# Altium PCB PCB1.PcbDoc
Units mm, origin at the board's own origin, x right, y up, seen from the top; angles counter-clockwise.
Board outline 50 x 50 mm, 2 copper layers (Top Layer, Bottom Layer); 11 components, 11 nets, 36 pads, 0 vias.
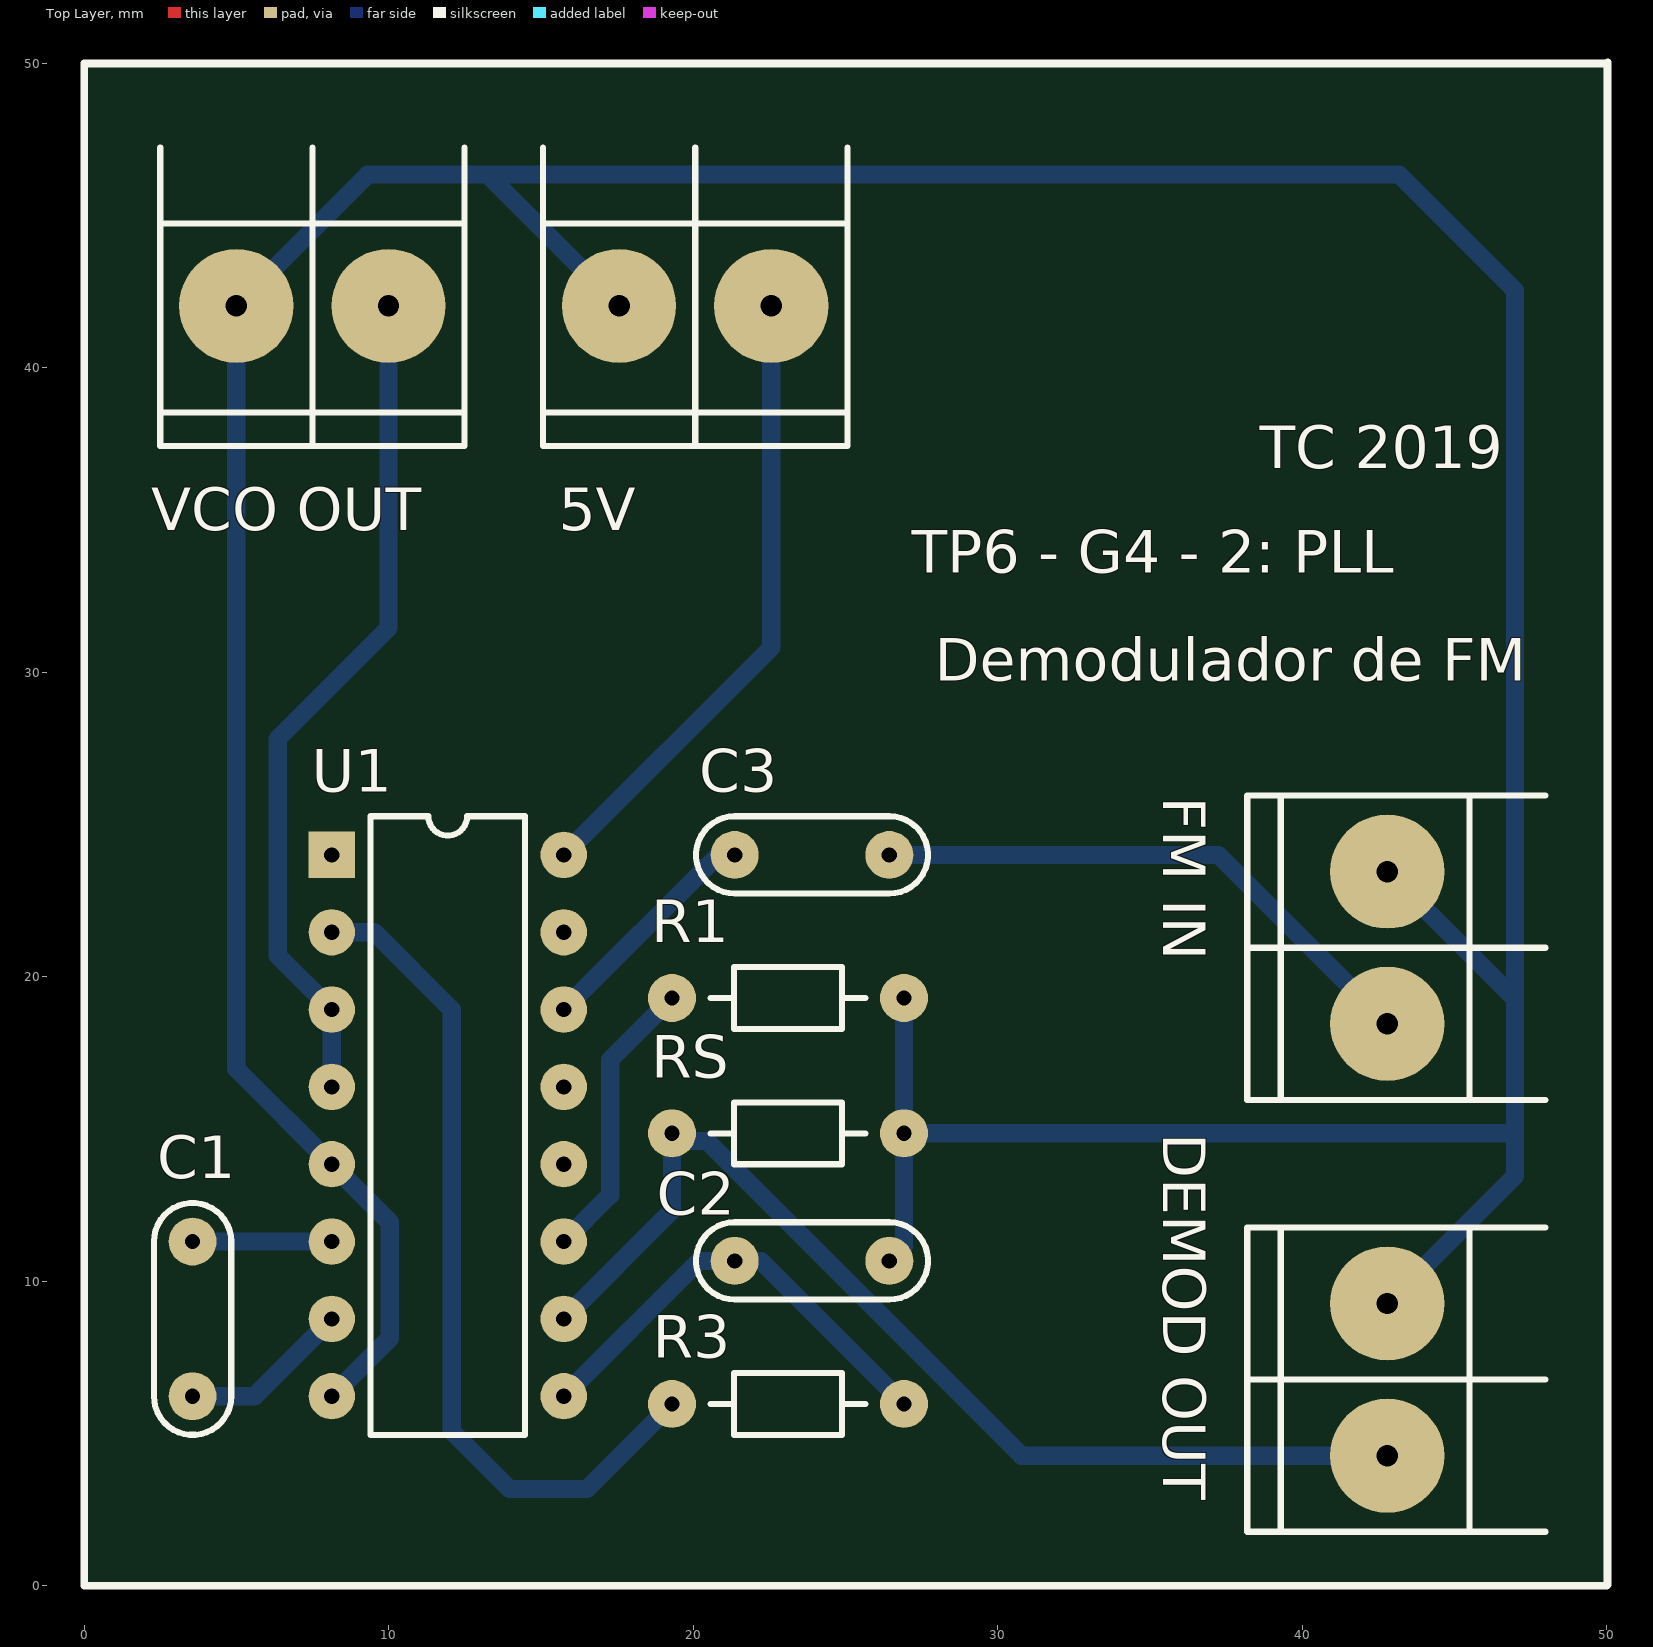
[diagram p0: Top Layer view]
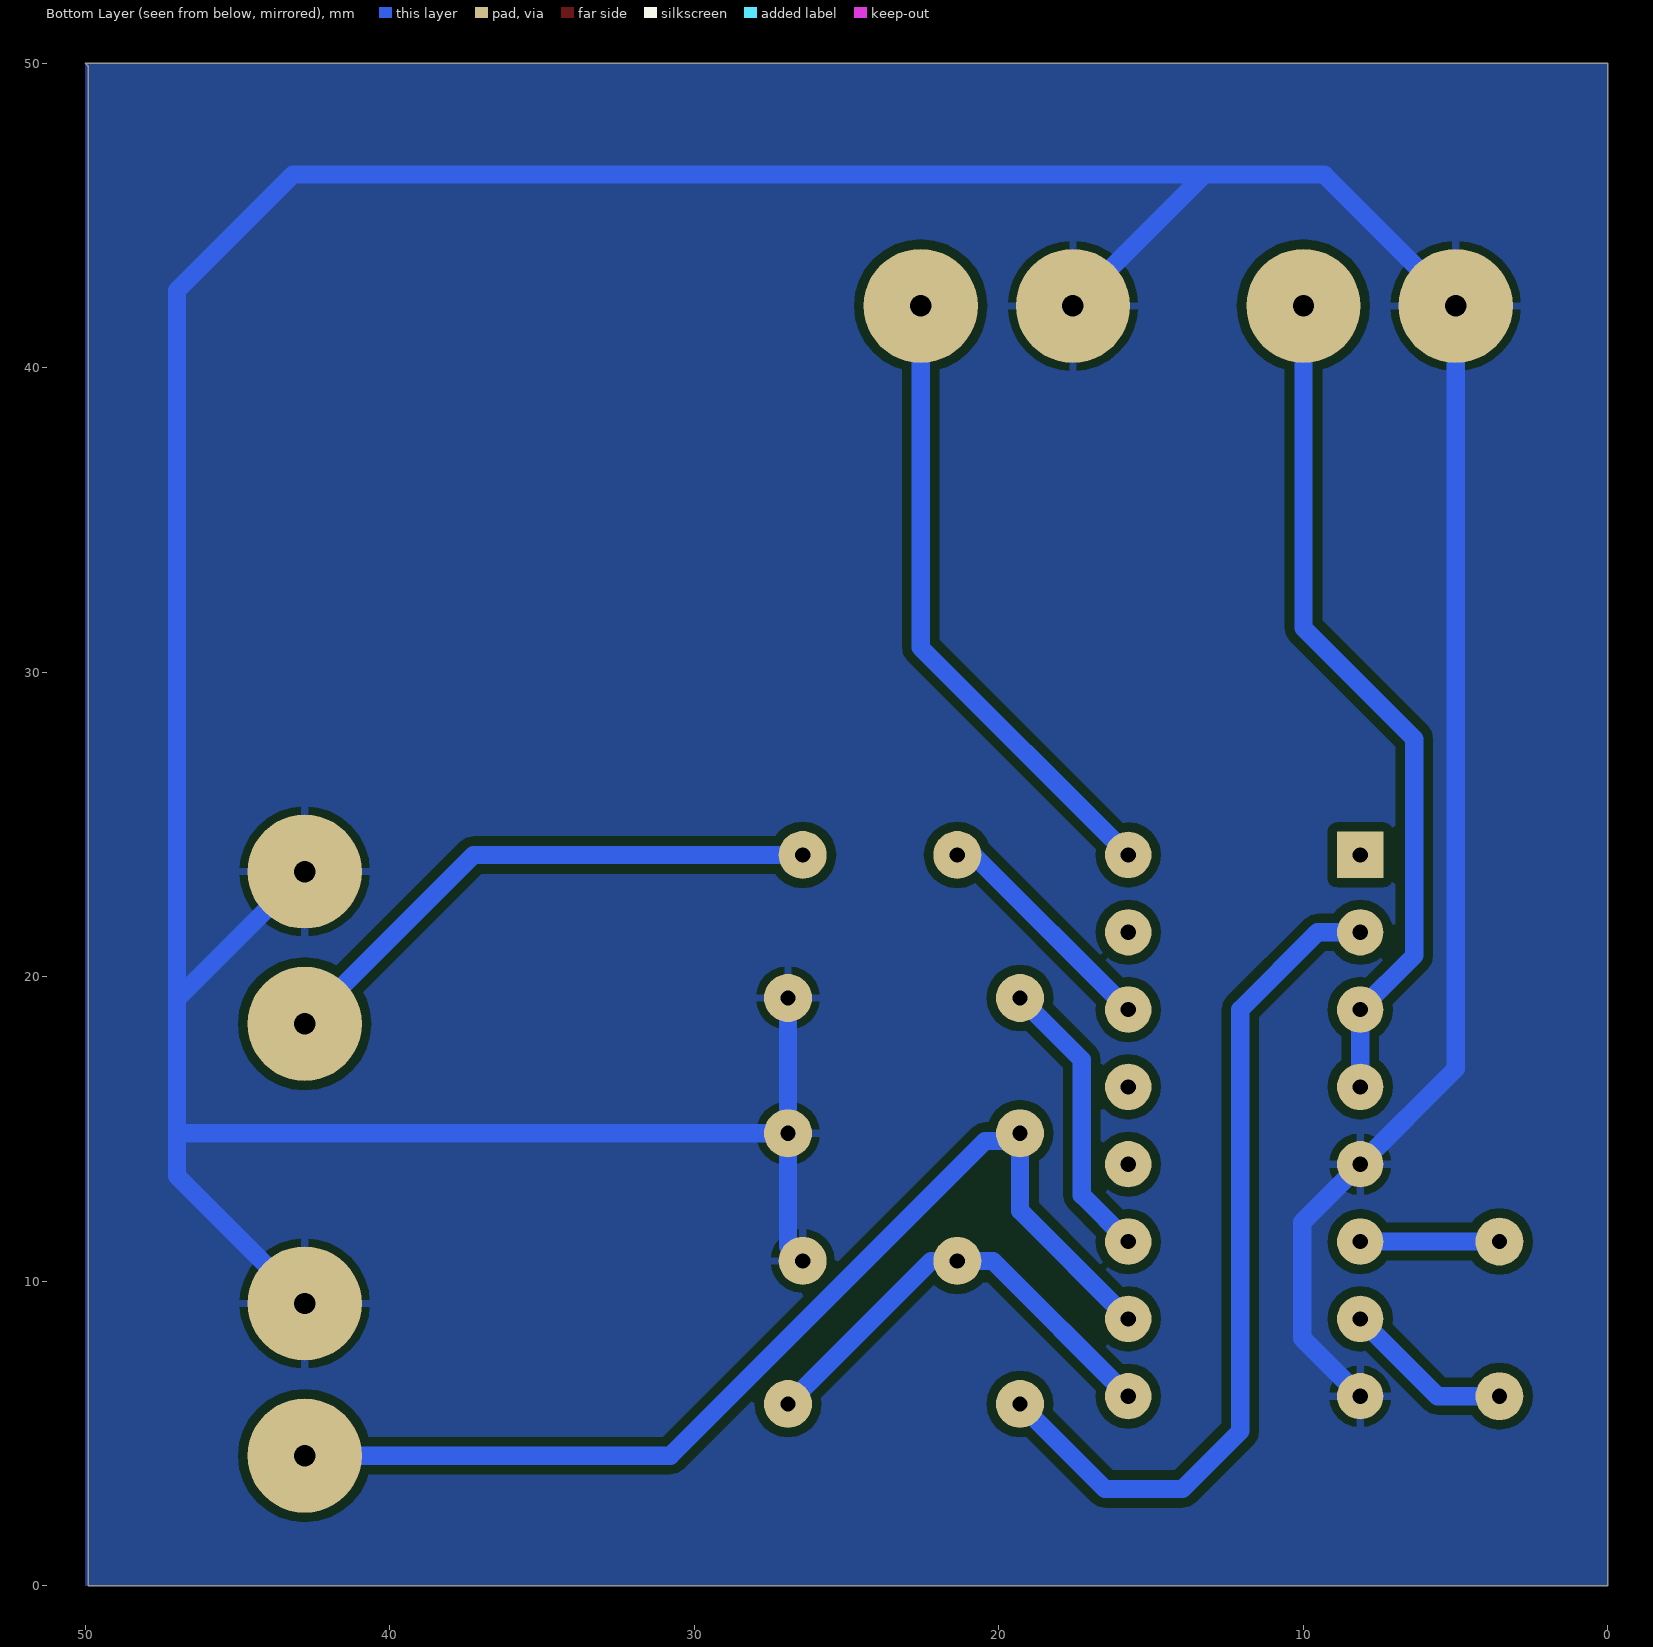
[diagram p1: Bottom Layer view, seen from below]
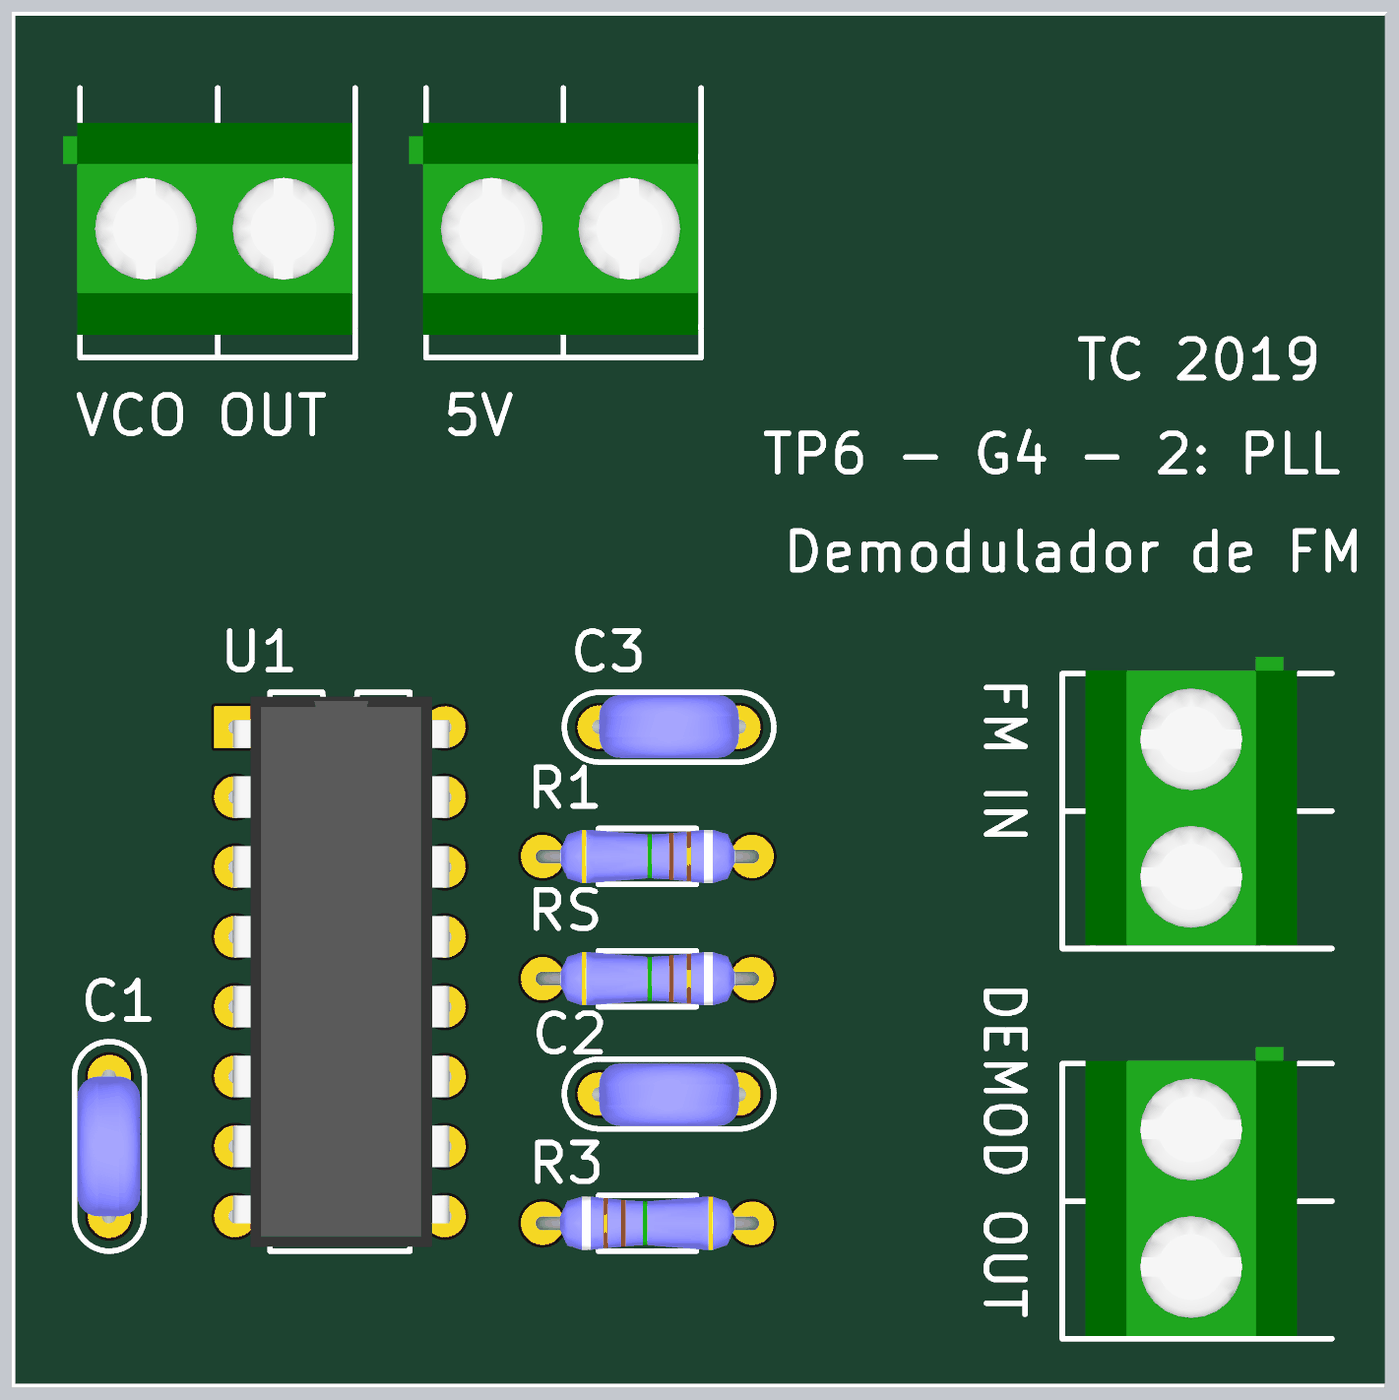
[diagram p2: 3D render of the assembled board from above, using the file's embedded part models]

## Layer stack, top to bottom
Top Solder: solder mask 0.0102, Solder Resist, Dk 3.5
Top Layer: signal copper 0.0356
Dielectric 1: dielectric 0.32, FR-4, Dk 4.8
Bottom Layer: signal copper 0.0356
Bottom Solder: solder mask 0.0102, Solder Resist, Dk 3.5

## Board outline
0,0 0,50 50,50 49.911,49.911 49.911,0

## Design rules (kind name [scope] priority, off if disabled: settings)
Clearance [All] p1: gap=0.3 ignorepadtopadclearanceinfootprint=FALSE
PolygonConnect [All] p1: connectstyle=Relief reliefconductorwidth=0.254 reliefentries=4 polygonreliefangle="90 Angle" airgapwidth=0.254
RoutingVias [All] p1: holewidth=0.711 width=1.27 viastyle="Through Hole" minholewidth=0.711 minwidth=1.27 maxholewidth=0.711 maxwidth=1.27
SolderMaskExpansion [All] p1: expansion=0.102
Width [All] p1: maxlimit=0.6 minlimit=0.6 preferedwidth=0.6
30 further rules are at their usual default settings.

## Components (designator, comment, footprint, x,y, rotation, side; value= is the part's Value field where it differs from the comment)
5V "VCC" BORNERA2 20.066,42.037 r90 top
C1 "500pF" CAP200 3.556,8.763 r270 top
C2 "0.1uF" CAP200 23.903,10.668 r0 top
C3 "10nF" CAP200 23.903,24.003 r180 top
"DEMOD OUT" "BORNERA 2" BORNERA2 42.799,6.771 r0 top (schematic designator OUT)
"FM IN" "BORNERA 2" BORNERA2 42.799,20.955 r0 top
R1 "100k" RES300 26.924,19.304 r180 top
R3 "100k" RES300 19.304,5.969 r0 top
RS "100k" RES300 26.924,14.859 r180 top
U1 "CD4046B" DIP16 8.128,24.003 r0 top
"VCO OUT" "BORNERA 2" BORNERA2 7.493,42.037 r90 top

## Footprints (in the part's own frame and the unit in brackets; to place one, negate y for a bottom-side part, rotate by r counter-clockwise, add the part's x,y. Pads: shape width x height; smd on the part's side, far side on the other; paste and mask are expansions set on the pad)
BORNERA2 [mm] "Bornera con Tornillos 5mm separación"
  round 3.75 hole 0.7: 1(0,2.5) 2(0,-2.5)
  silkscreen extent -4.6,-5 5.2,5, body extent -3.76,-4.89 3.94,5.61, height 10
CAP200 [mil]
  round 62 hole 19.68: 1(-100,0) 2(100,0)
  silkscreen extent -150,-50 150,50, body extent -110,-46 110,44, height 246
DIP16 [mil]
  rect 60x60 hole 19.68: 1(0,0)
  round 60 hole 19.68: 2(0,-100) 3(0,-200) 4(0,-300) 5(0,-400) 6(0,-500) 7(0,-600) 8(0,-700) 9(300,-700) 10(300,-600) 11(300,-500) 12(300,-400) 13(300,-300) 14(300,-200) 15(300,-100) 16(300,0)
  silkscreen extent 50,-750 250,50, body extent -3,-744 307,44, height 78
RES300 [mil]
  round 62 hole 19.68: 1(0,0) 2(300,0)
  silkscreen extent 50,-40 250,40, body extent -10,-38 310,38, height 79

## Part data
5V: library part "BORNERA 2"
C1 C2 C3: library part CAP
R1 R3 RS: library part RES
U1: library part IC_DIP16

## Nets (pads, with @x,y where several pads share a name; then routed paths per layer and width w, separated by ;. In a path a pad name is that pad's centre, name@x,y a point inside that pad or via, vN(x,y) a via of type N, cw(c..) or ccw(c..) an arc to the next point about the centre after c; other vN are vias at no path point)
GND: 5V.1 "DEMOD OUT.1" "FM IN.1" "VCO OUT.1" C2.2 R1.1 RS.1 U1.5 U1.8 | length 160
  Bottom Layer w0.6: U1.8 10.033,8.128 10.033,11.938 U1.5 4.993,16.978 4.993,42.037 9.311,46.355 13.248,46.355 ; 5V.1 13.248,46.355 ; C2.2 26.924,11.149 RS.1 ; R1.1 RS.1 ; 42.799,9.271 46.99,13.462 46.99,14.859 ; 42.799,23.455 46.99,19.264 ; 13.248,46.355 43.18,46.355 46.99,42.545 46.99,19.264 ; RS.1 46.99,14.859 ; 46.99,14.859 46.99,19.264
NetC1_1: C1.1 U1.6 | length 4.6
  Bottom Layer w0.6: C1.1 U1.6
NetC1_2: C1.2 U1.7 | length 5.6
  Bottom Layer w0.6: C1.2 5.588,6.223 U1.7
NetC2_1: C2.1 R3.2 U1.9 | length 15
  Bottom Layer w0.6: U1.9 20.193,10.668 C2.1 22.225,10.668 R3.2
NetC3_1: "FM IN.2" C3.1 | length 18.7
  Bottom Layer w0.6: C3.1 37.251,24.003 42.799,18.455
NetC3_2: C3.2 U1.14 | length 7.7
  Bottom Layer w0.6: U1.14 20.828,24.003 C3.2
NetOUT_2: "DEMOD OUT.2" RS.2 U1.10 | length 35.4
  Bottom Layer w0.6: U1.10 19.304,12.319 RS.2 19.558,14.605 20.447,14.605 30.781,4.271 42.799,4.271
NetR1_2: R1.2 U1.11 | length 9.5
  Bottom Layer w0.6: U1.11 17.272,12.827 17.272,17.272 R1.2
NetR3_1: R3.1 U1.2 | length 28
  Bottom Layer w0.6: U1.2 9.525,21.463 12.065,18.923 12.065,5.08 13.97,3.175 16.51,3.175 R3.1
NetU1_3: "VCO OUT.2" U1.3 U1.4 | length 27.9
  Bottom Layer w0.6: U1.4 U1.3 6.35,20.701 6.35,27.813 9.993,31.456 9.993,42.037
VCC: 5V.2 U1.16 | length 20.9
  Bottom Layer w0.6: U1.16 22.566,30.821 5V.2
pads on no net: U1.1 U1.12 U1.13 U1.15

## Polygon pours and split planes (outlines as drawn)
GND on Bottom Layer "GND_L02_P000" (solid, remove dead copper, pour order 0): 0,0 0,50 50,50 50,0

## Silkscreen, mask and mechanical layers (free items; w line width, h text height)
Top Overlay:
  lines w0.254: 0,0 0,50 50,50 50.038,50.038 50.038,0.038 50,0 0,0
  text "TC 2019" at 38.603,36.703 h1.4
  text "TP6 - G4 - 2: PLL" at 27.18,33.274 h1.4
  text "Demodulador de FM" at 27.94,29.718 h1.4